# EAGLE board HighAcc (EAGLE 6.2)
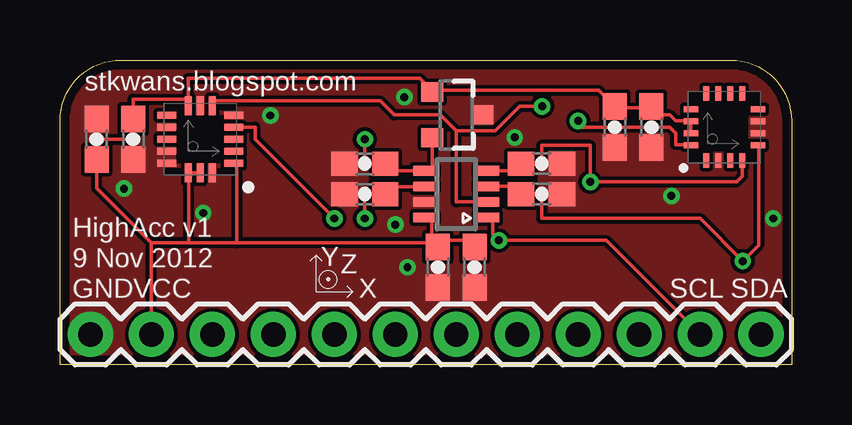
[diagram p0: board, top side]
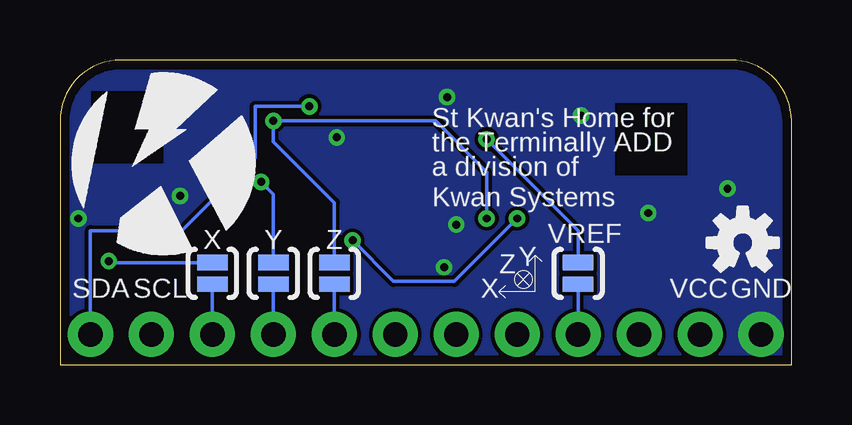
[diagram p1: board, bottom side, seen from below]

Size 30.48 x 12.7 mm. Coordinates in mm from the lower left corner, seen from the top.
Outline: 0,0 0,10.16 arc-90 2.54,12.7 27.94,12.7 arc-90 30.48,10.16 30.48,0 0,0
Copper layers (1*16): Top 0.0356mm / dielectric 1.5011mm / Bottom 0.0356mm
Design rules: minimum track width 6mil, minimum drill 13mil, track to track 6mil, track to pad 6mil, pad to pad 6mil, via to via 6mil, smd to smd 6mil, copper to edge 15mil, drill to drill 6mil, minimum pad ring 7mil, minimum via ring 7mil, stop-mask expansion 4mil, vias tented up to drill 14mil, thermal gap 10mil
Net classes: 0 default: width 0.152 mm, drill 0.33 mm, clearance 0.152 mm; 1 POWER: width 0.152 mm, drill 0.33 mm, clearance 0.152 mm; 2 hv: width 0.152 mm, drill 0.33 mm, clearance 0.152 mm
vRestrict: area 22.4,6.1 to 24.9,10.7; area 23.9,8.6 to 27.4,12.4; area 25.1,4.8 to 28.2,7.6; area 28.4,6.9 to 30,11.7

## Footprints (pad centres in the part's own frame; a part is rotated, then mirrored left to right if it is on the bottom)
0603-CAP = smd 1.1 x 1: 1 -0.85,0; 2 0.85,0
1X12 = drill 1.016 pad 1.88: 1 0,0; 2 2.54,0; 3 5.08,0; 4 7.62,0; 5 10.16,0; 6 12.7,0; 7 15.24,0; 8 17.78,0; 9 20.32,0; 10 22.86,0; 11 25.4,0; 12 27.94,0
SJ_2S-NO = smd 0.635 x 1.27: 1 -0.45,0; 2 0.45,0
SOT-23-8 = smd 0.4 x 1: 1 -0.975,-1.3; 2 -0.325,-1.3; 3 0.325,-1.3; 4 0.975,-1.3; 5 0.975,1.3; 6 0.325,1.3; 7 -0.325,1.3; 8 -0.975,1.3
SOT-23-3 = smd 0.9 x 0.8: 1 -1,0.95; 2 -1,-0.95; 3 1.1,0
LLGA16 = smd 0.8 x 0.3: 1 -1.4,1; 2 -1.4,0.5; 3 -1.4,0; 4 -1.4,-0.5; 5 -1.4,-1; 9 1.4,-1; 10 1.4,-0.5; 11 1.4,0; 12 1.4,0.5; 13 1.4,1 | smd 0.3 x 0.8: 6 -0.5,-1.4; 7 0,-1.4; 8 0.5,-1.4; 14 0.5,1.4; 15 0,1.4; 16 -0.5,1.4
ADXL377 = smd 0.6 x 0.25: 1 -1.4,0.75; 2 -1.4,0.25; 3 -1.4,-0.25; 4 -1.4,-0.75; 9 1.4,-0.75; 10 1.4,-0.25; 11 1.4,0.25; 12 1.4,0.75 | smd 0.25 x 0.6: 5 -0.75,-1.4; 6 -0.25,-1.4; 7 0.25,-1.4; 8 0.75,-1.4; 13 0.75,1.4; 14 0.25,1.4; 15 -0.25,1.4; 16 -0.75,1.4

## Placement (x,y rotation side)
C102  10uF  [0603-CAP]  12.7,8.38 180 top
C107  100nF  [0603-CAP]  15.75,4.06 270 top
C108  10uF  [0603-CAP]  17.27,4.06 270 top
C801  100nF  [0603-CAP]  3.05,9.4 270 top
C814  10uF  [0603-CAP]  1.52,9.4 90 top
C904  100nF  [0603-CAP]  20.07,8.38 0 top
C905  100nF  [0603-CAP]  20.07,7.11 0 top
C914  100nF  [0603-CAP]  23.11,9.91 270 top
C915  10uF  [0603-CAP]  24.64,9.91 270 top
C916  100nF  [0603-CAP]  12.7,7.11 180 top
J401  [1X12]  29.21,1.27 180 top
SJ1  SOLDERJUMPERNO  [SJ_2S-NO]  24.13,3.81 90 bottom
SJ2  SOLDERJUMPERNO  [SJ_2S-NO]  21.59,3.81 90 bottom
SJ3  SOLDERJUMPERNO  [SJ_2S-NO]  19.05,3.81 90 bottom
SJ4  SOLDERJUMPERNO  [SJ_2S-NO]  8.89,3.81 90 bottom
U101  AD7995  [SOT-23-8]  16.51,7.11 90 top
U102  MCP1525  [SOT-23-3]  16.51,10.41 0 top
U801  H3LIS331DL  [LLGA16]  5.84,9.4 180 top
U901  ADXL377  [ADXL377]  27.69,9.91 90 top
U$1  [KWAN_CIRCLE]  26.16,8.38 0 bottom
U$2  OSHW-LOGOS  [OSHW-LOGO-S]  2.03,5.08 0 bottom
U$4  [AXES_SM]  10.67,3.05 0 top

## Library data of the parts
C102 C108 C814 C915 = SparkFun; DIGIKEY: 445-7486-1-ND
C107 C801 C904 C905 C914 C916 = SparkFun; DIGIKEY: 445-1316-1-ND
J401 = SparkFun; DIGIKEY: $NOPART; HEADER_INVERT_3D50: 0; HEADER_TYPE_3D50: 0
SJ1-SJ4 = SparkFun-Passives; DIGIKEY: $NOPART
U101 = KwanSystems; DIGIKEY: AD7995YRJZ-1500RL7CT-ND
U102 = KwanSystems; DIGIKEY: MCP1525T-I/TTCT-ND; LABEL_3D50: 1525; LOGO_3D50: NOLOGO
U801 = KwanSystems; DIGIKEY: $NOPART; LOGO_3D50: ST
U901 = KwanSystems; DIGIKEY: ADXL377BCPZ-RL7CT-ND; LABEL_3D50: AD377; LOGO_3D50: NOLOGO
U$1 U$4 = KwanSystems
U$2 = SparkFun; DIGIKEY: $NOPART

## Nets
GND: C102.2 C107.2 C108.2 C801.2 C814.2 C904.2 C905.2 C914.2 C915.2 C916.2 J401.12 U101.7 U102.3 U801.5 U801.7 U801.10 U801.12 U801.13 U801.16 U901.2 U901.6 U901.7
N$1: J401.3 SJ1.1
N$2: J401.4 SJ2.1
N$3: J401.5 SJ3.1
N$4: J401.9 SJ4.1
SCL: J401.2 U101.1 U801.4
SDA: J401.1 U101.2 U801.6
VCC [POWER]: C107.1 C108.1 C801.1 C814.1 C914.1 C915.1 J401.11 U101.8 U102.1 U801.1 U801.8 U801.14 U801.15 U901.14 U901.15
VREF: C102.1 SJ4.2 U101.5 U102.2
XACC: C905.1 SJ1.2 U101.3 U901.5
YACC: C904.1 SJ2.2 U101.4 U901.4
ZACC: C916.1 SJ3.2 U101.6 U901.16

## Tracks (layer width: path | path; a pad name or v marks a point on that pad's centre or on a via)
GND  (via drill 0.33)
  other vias: 13.97,5.84 14.48,4.06 25.48,7.04 18.95,9.47 5.97,6.32 8.76,10.39 29.72,6.1 2.67,7.34 14.35,11.15
  pour Top (no thermals): 2.54,12.7 27.94,12.7 arc-90 30.48,10.16 30.48,0 0,0 0,10.16 arc-90
  pour Bottom (no thermals): 2.54,12.7 27.94,12.7 arc-90 30.48,10.16 30.48,0 0,0 0,10.16 arc-90
N$1
  Bottom 0.152: J401.3 SJ1.1
N$2
  Bottom 0.152: J401.4 SJ2.1
N$3
  Bottom 0.152: J401.5 SJ3.1
N$4
  Bottom 0.152: J401.9 SJ4.1
SCL  (via drill 0.33)
  Top 0.152: 7.26,9.88 U801.4 8.13,9.9 8.13,9.4 v11.43,6.1 | J401.2 22.76,5.18 v18.29,5.18 18.03,5.44 18.03,6.14 U101.1
  Bottom 0.152: v11.43,6.1 14.05,3.48 16.59,3.48 v18.29,5.18
SDA  (via drill 0.33)
  Top 0.152: 6.35,10.82 U801.6 6.34,11 13.34,11 13.92,10.41 15.85,10.41 16.51,9.75 | 16.51,9.75 16.51,6.79 U101.2 | 16.51,9.75 18.14,9.75 19.15,10.77 v20.09,10.77
  Bottom 0.152: J401.1 29.21,5.59 25.4,5.59 22.35,8.64 22.35,10.77 v20.09,10.77
VCC
  Top 0.152: U801.1 7.26,8.38 7.37,8.38 7.37,5.08 | 5.34,11.07 3.05,11.07 C801.1 3.05,9.4 1.52,9.4 1.52,8.64 C814.1 | 5.33,10.82 U801.8 5.34,11.07 | U901.15 26.29,9.68 26.29,10.13 U901.14 26.21,10.19 26.19,10.16 25.65,10.16 25.4,10.41 24.98,10.41 arc-90 C915.1 | 24.64,10.74 C915.1 | C915.1 24.59,10.72 23.16,10.72 C914.1 22.45,11.43 15.58,11.43 arc90 U102.1 15.51,11.41 14.99,11.94 5.34,11.94 5.34,11.07 | 15.21,6.12 U101.8 | 15.75,5.18 C107.1 | C108.1 17.27,5.18 15.8,5.18 C107.1 | 5.36,8 U801.14 5.33,7.92 | C814.1 | 15.14,6.12 U101.8 | 5.36,8 U801.15 | U101.8 15.49,6.14 15.49,5.17 | 15.49,5.17 15.49,5.08 7.37,5.08 | 15.49,5.17 C107.1 | 5.36,5.08 5.36,8 | 7.37,5.08 5.36,5.08 | 5.36,5.08 3.81,5.08 | 3.81,5.08 1.52,7.37 C814.1 | 1.52,8.53 C814.1 | J401.11 3.81,5.08
VREF  (via drill 0.33)
  Top 0.152: U102.2 15.51,8.09 U101.5 13.85,8.09 arc-90 C102.1 12.7,8.38 v12.7,9.4
  Bottom 0.152: v12.7,9.4 8.89,5.59 SJ4.2
XACC  (via drill 0.33)
  Top 0.152: U901.5 29.11,9.14 29.11,4.98 v28.45,4.32 26.67,6.1 20.07,6.1 20.07,7.11 C905.1 19.22,7.44 U101.3
  Bottom 0.152: SJ1.2 | 24.08,4.32 SJ1.2 | SJ1.2 28.39,4.26 v28.45,4.32
YACC  (via drill 0.33)
  Top 0.152: 19.23,8.64 C904.1 | 18.94,8.36 arc90 C904.1 | C904.1 20.07,8.38 20.07,9.14 22.1,9.14 v22.1,7.62 28.19,7.62 28.44,7.86 U901.4 | U101.4 18.92,8.09 arc90 C904.1
  Bottom 0.152: SJ2.2 21.59,7.11 v22.1,7.62
ZACC  (via drill 0.33)
  Top 0.152: U101.6 15.19,7.42 14.11,7.42 C916.1 | 13.56,6.86 C916.1 | U901.16 26.26,9.17 25.65,9.17 25.65,9.65 25.4,9.91 21.59,9.91 v21.59,10.16 | v12.7,6.1 12.7,7.11 C916.1
  Bottom 0.152: SJ3.2 19.05,6.76 21.59,9.3 v21.59,10.16 14.83,10.16 12.7,8.03 v12.7,6.1

## Text on the board
tPlace: stkwans.blogspot.com | HighAcc v1 | 9 Nov 2012 | GND | VCC | SCL | SDA
bPlace: St Kwan's Home for | the Terminally ADD | a division of | Kwan Systems | VREF | Z | Y | X | GND | VCC | SCL | SDA